# Altium PCB Main_PCB_V1.1.PcbDoc
Units mm, origin at the board's own origin, x right, y up, seen from the top; angles counter-clockwise.
Board outline 100.23 x 100.25 mm, 2 copper layers (Top Layer, Bottom Layer); 142 components, 115 nets, 540 pads, 24 vias.
Unrouted connection lines stored in the file: 336.
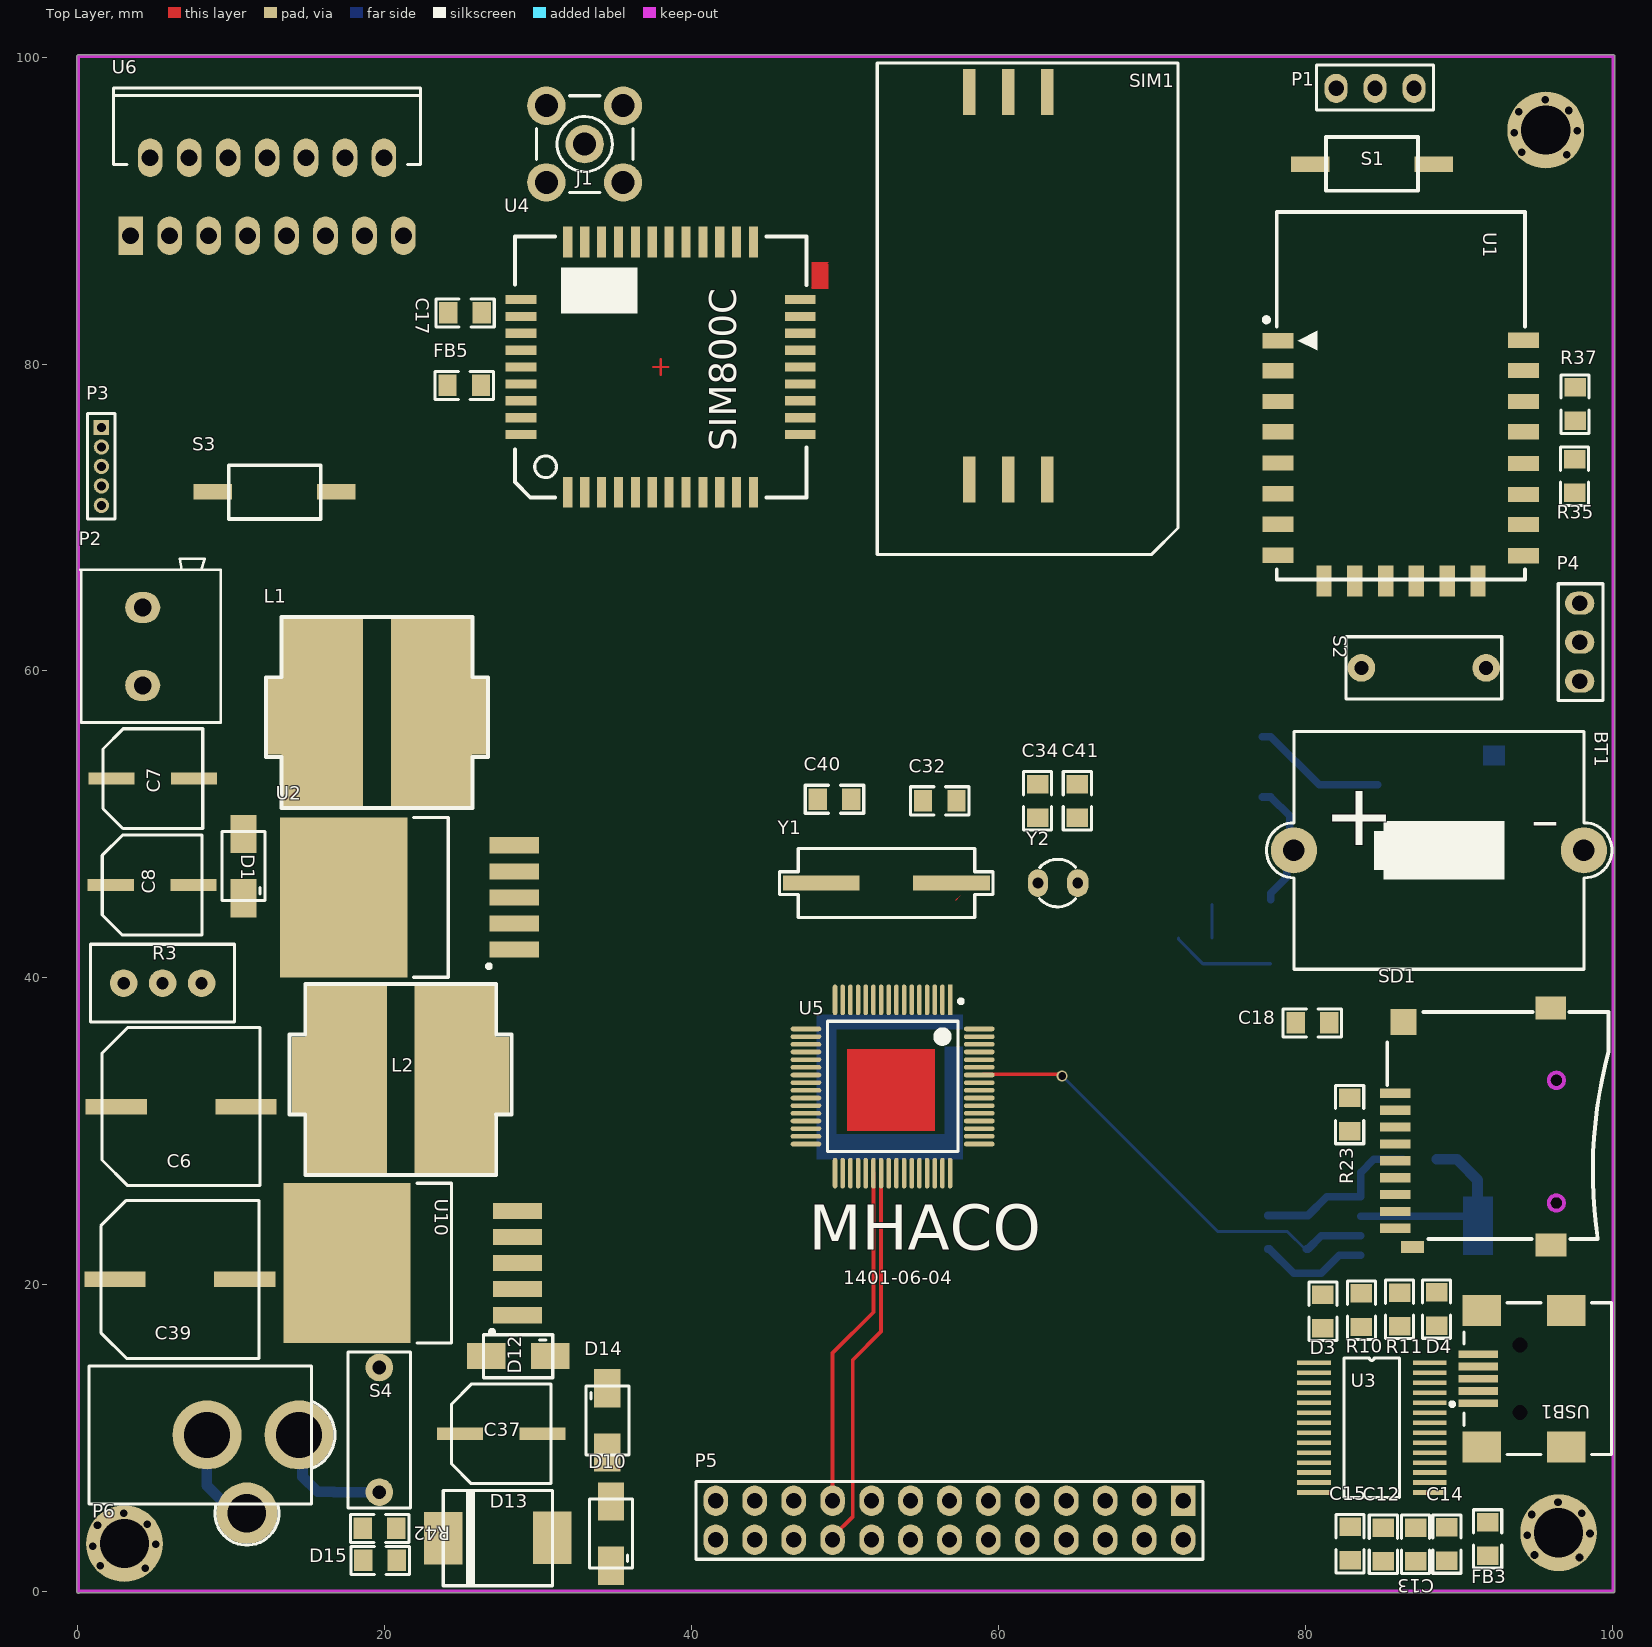
[diagram p0: Top Layer view]
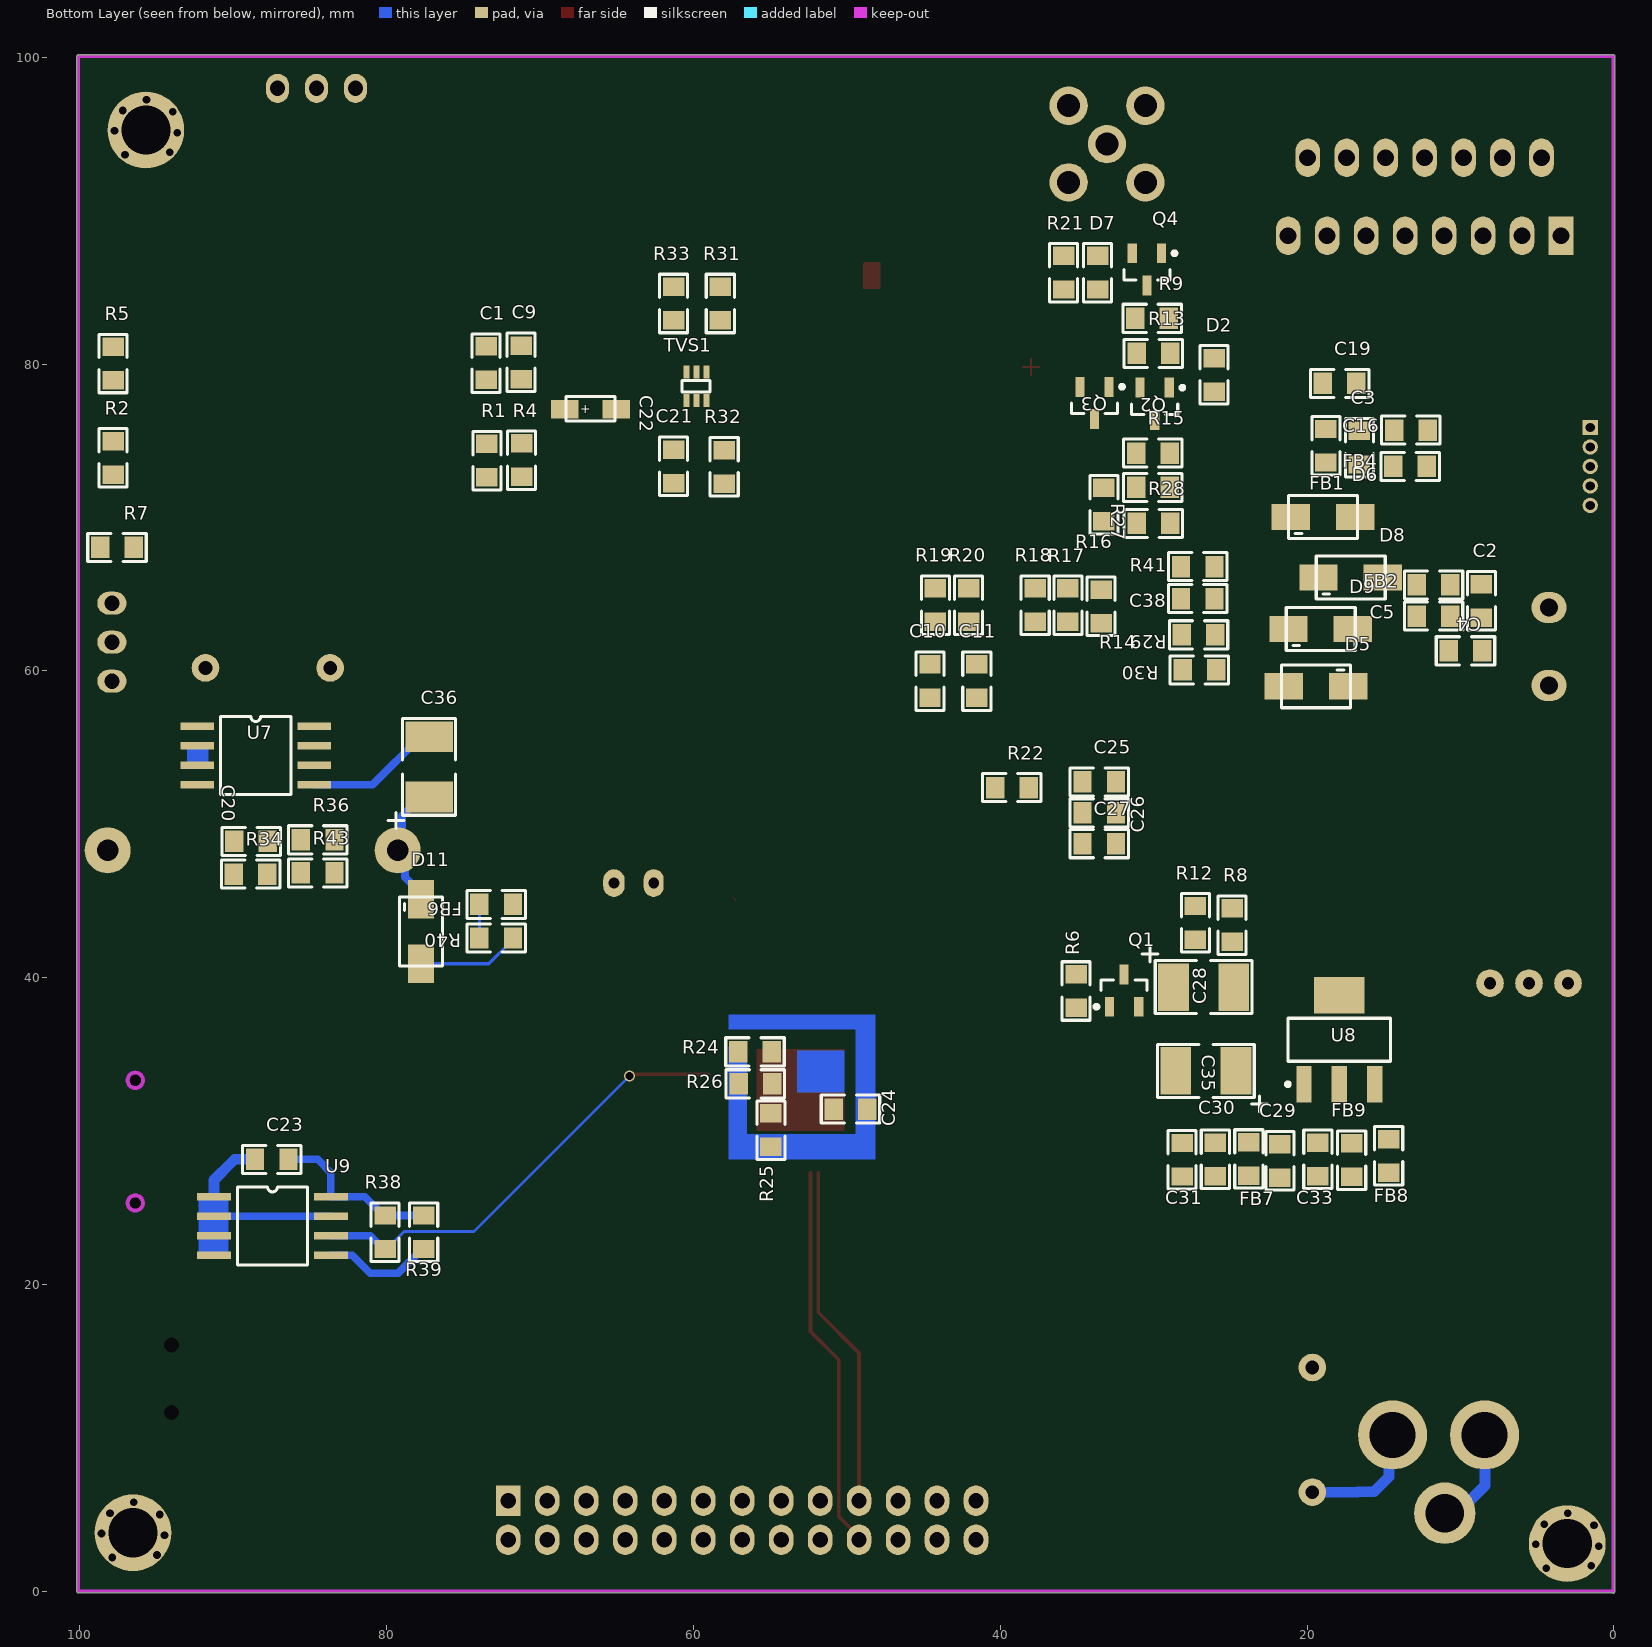
[diagram p1: Bottom Layer view, seen from below]

## Layer stack, top to bottom
Top Solder: solder mask 0.0102, Solder Resist, Dk 3.5
Top Layer: signal copper 0.0356
Dielectric1: dielectric 0.32, FR-4, Dk 4.8
Bottom Layer: signal copper 0.0356
Bottom Solder: solder mask 0.0102, Solder Resist, Dk 3.5

## Board outline
-0.05,0 ccw(c0.051,0) 0.118,-0.075 100.076,-0.075 ccw(c100.076,0.025) 100.177,0.025 ccw(c100.076,0.025) 100.176,0.039 ccw(c100.076,0.051) 100.176,0.051 100.176,100.051 ccw(c100.076,100.051) 100.076,100.151 0.051,100.151 ccw(c0.051,100.051) -0.05,100.051

## Design rules (kind name [scope] priority, off if disabled: settings)
Clearance [All] p1: gap=0.2 ignorepadtopadclearanceinfootprint=FALSE except(0.3: Arc-Fill Arc-Poly Arc-Region Track-Fill Track-Poly Track-Region SMDPad-Fill SMDPad-Poly SMDPad-Region THPad-Fill THPad-Poly THPad-Region Via-Fill Via-Poly Via-Region Fill-Fill Fill-Poly Fill-Region Poly-Poly Poly-Region Region-Region)
Height [All] p1 off: minheight=0 maxheight=25.4 prefheight=12.7
HoleSize [All] p1 off: absolutevalues=TRUE maxlimit=2.54 minlimit=0.025 maxpercent=80.000 minpercent=20.000
HoleToHoleClearance [All] p1 off: gap=0.254 allowstackedmicrovias=TRUE
LayerPairs [All] p1 off: enforce=TRUE
MinimumSolderMaskSliver [All] p1 off: minsoldermaskwidth=0.254
PolygonConnect [All] p1: connectstyle=Relief reliefconductorwidth=0.3 reliefentries=4 polygonreliefangle="90 Angle" airgapwidth=0.3
RoutingVias [All] p1: holewidth=0.5 width=0.7 viastyle="Through Hole" minholewidth=0.5 minwidth=0.7 maxholewidth=2 maxwidth=1.5
SilkToSilkClearance [All] p1 off: silktosilkclearance=0.254
SilkToSolderMaskClearance [IsPad] p1 off: minsilkscreentomaskgap=0.254 clearancetoexposedcopper=TRUE
SolderMaskExpansion [All] p1: expansion=0.102 istentingtop=FALSE
Width [All] p1: maxlimit=0.7 minlimit=0.2 preferedwidth=0.5
23 further rules are at their usual default settings.

## Components (designator, comment, footprint, x,y, rotation, side; value= is the part's Value field where it differs from the comment)
BT1 "Battery" CHARGING_BATT 79.271,49.581 r0 top
C1 "100nF" SMD_805 73.533,80.035 r180 bottom
C2 "10nF" SMD_805 8.661,64.541 r180 bottom
C3 "100nF" SMD_805 16.561,74.574 r0 bottom
C4 "100nF" SMD_805 9.652,61.29 r90 bottom
C5 "100nF" SMD_805 11.786,63.602 r270 bottom
C6 "220uF" c_cyl_smd 6.553,31.674 r180 top
C7 "100uF" c_cyl_smd2 4.978,52.781 r180 top
C8 "100uF" C_CYL_SMD2 4.928,45.847 r180 top
C9 "100nF" SMD_805 71.247,80.086 r180 bottom
C10 "100nF" SMD_805 44.602,59.309 r180 bottom
C11 "100nF" SMD_805 41.554,59.309 r180 bottom
C12 "10nF" SMD_805 85.115,3.099 r180 top
C13 "100nF" SMD_805 87.224,3.099 r180 top
C14 "47nF" SMD_805 89.256,3.124 r180 top
C15 "100nF" SMD_805 82.956,3.15 r180 top
C16 "100nF" SMD_805 13.259,75.717 r270 bottom
C17 "100nF" SMD_805 25.222,83.363 r270 top
C18 "100nF" SMD_805 80.442,37.084 r270 top
C19 "1uF" SMD_805 17.856,78.715 r90 bottom value=100nF
C20 "100nF" SMD_805 88.849,48.92 r270 bottom
C21 "22pF" SMD_805 61.265,73.355 r0 bottom
C22 "1uF" CAP_SMD_A 66.7,77.089 r180 bottom value=1nF
C23 "100nF" SMD_805 87.503,28.194 r270 bottom
C24 "100nF" SMD_805 49.733,31.42 r90 bottom
C25 "100nF" SMD_805 33.519,52.745 r90 bottom
C26 "100nF" SMD_805 33.519,50.731 r90 bottom
C27 "100nF" SMD_805 33.519,48.716 r90 bottom
C28 "100uF" C_B 26.67,39.395 r270 bottom
C29 "100nF" SMD_805 21.742,28.092 r0 bottom
C30 "100nF" SMD_805 23.774,28.219 r0 bottom
C31 "100nF" SMD_805 28.169,28.118 r180 bottom
C32 "18pF" SMD_805 56.159,51.562 r270 top
C33 "100nF" SMD_805 19.329,28.143 r180 bottom
C34 "18pF" SMD_805 62.586,51.562 r180 top
C35 "10uF" C_B 26.67,33.934 r90 bottom
C36 "10uF" C_B 77.216,53.823 r180 bottom
C37 "100uF" C_CYL_SMD2 27.686,10.084 r180 top
C38 "100nF" SMD_805 27.102,64.694 r90 bottom
C39 "1000uF" c_CYL_smd 6.477,20.422 r180 top
C40 "18pF" SMD_805 49.352,51.613 r90 top
C41 "18pF" SMD_805 65.176,51.562 r180 top
D1 "SM5822" TVS 10.795,47.219 r180 top
D2 "LED0" SMD_805 26.086,79.273 r180 bottom
D3 "LED0" SMD_805 81.178,18.288 r180 top
D4 "LED0" SMD_805 88.595,18.44 r180 top
D5 "SM4007" TVS 19.355,58.979 r270 bottom
D6 "SM4007" TVS 19.025,70.053 r90 bottom
D7 "LED0" SMD_805 33.68,85.928 r180 bottom
D8 "SM4007" TVS 17.221,66.116 r90 bottom
D9 "SM4007" TVS 19.177,62.763 r90 bottom
D10 "SMBJ 5V" tvs 34.747,3.708 r180 top
D11 "1N4148" TVS 77.724,43.078 r180 bottom
D12 "SM4007" TVS 28.778,15.316 r270 top
D13 "SM5822" DO_214_AB_SMC 27.356,3.48 r180 top
D14 "SMBJ 5V" TVS 34.544,11.227 r0 top
D15 "LED0" SMD_805 19.736,2.007 r90 top
FB1 "FERRIT" SMD_805 18.745,74.701 r0 bottom
FB2 "FERRIT" SMD_805 11.735,65.583 r90 bottom
FB3 "FERRIT" SMD_805 91.872,3.404 r0 top
FB4 "FERRIT" SMD_805 13.259,73.304 r90 bottom
FB5 "FERRIT" SMD_805 25.222,78.588 r90 top
FB6 "FERRIT" SMD_805 72.873,44.806 r270 bottom
FB7 "FERRIT" SMD_805 25.959,28.194 r0 bottom
FB8 "FERRIT" SMD_805 14.707,28.372 r180 bottom
FB9 "FERRIT" SMD_805 17.12,28.092 r180 bottom
J1 "COAX-F" SMA 33.045,94.336 r0 top
L1 "33uH" INDUC_SMD 19.507,57.556 r0 top
L2 "100uH" INDUC_SMD 21.057,33.122 r180 top
P1 "Header 3" HEADER-3P 84.43,97.968 r0 top
P2 "Header 2" Terminal_2 4.221,61.627 r180 top
P3 "Header 5" MHDR1X5 1.549,75.87 r270 top
P4 "Header 3" HEADER-3P 97.892,62.001 r270 top
P5 "Header 13X2" header_2x13 57.937,4.75 r270 top
P6 "Header 2" adap_jack 0.733,5.711 r0 top
Q1 "BC817" SOT23 31.928,39.04 r180 bottom
Q2 "BC817" SOT23 29.931,77.538 r0 bottom
Q3 "BC817" SOT23 33.858,77.597 r0 bottom
Q4 "BC817" SOT23 30.439,86.301 r0 bottom
R1 "6.8K" SMD_805 73.431,73.736 r0 bottom
R2 "1K" SMD_805 97.79,73.914 r0 bottom
R3 "RPot" POT 0.838,42.189 r270 top value=5K
R4 "1K" SMD_805 71.222,73.711 r180 bottom
R5 "1K" SMD_805 97.841,80.01 r180 bottom
R6 "10K" SMD_805 35.077,39.116 r180 bottom
R7 "1K" SMD_805 97.587,68.072 r270 bottom
R8 "680" SMD_805 24.867,43.459 r0 bottom
R9 "680" SMD_805 30.124,83.007 r270 bottom
R10 "270" SMD_805 83.642,18.313 r0 top
R11 "270" SMD_805 86.131,18.364 r0 top
R12 "6.8K" SMD_805 27.254,43.612 r0 bottom
R13 "1K" SMD_805 29.997,80.67 r90 bottom
R14 "1K" SMD_805 33.401,64.237 r0 bottom
R15 "10K" SMD_805 30.074,74.219 r270 bottom
R16 "10K" SMD_805 33.274,70.815 r180 bottom
R17 "1K" SMD_805 35.611,64.262 r180 bottom
R18 "1K" SMD_805 37.744,64.262 r180 bottom
R19 "5.6K" SMD_805 44.247,64.262 r180 bottom
R20 "1K" SMD_805 42.088,64.262 r180 bottom
R21 "680" SMD_805 35.89,85.928 r180 bottom
R22 "10K" SMD_805 39.268,52.426 r270 bottom
R23 "10K" SMD_805 82.931,31.115 r180 top value=1K
R24 "10K" SMD_805 55.956,35.154 r90 bottom value=1K
R25 "10K" SMD_805 54.915,30.099 r0 bottom value=1K
R26 "10K" SMD_805 55.931,33.071 r90 bottom value=1K
R27 "1K" SMD_805 30.074,71.984 r270 bottom
R28 "10K" SMD_805 29.997,69.596 r90 bottom
R29 "10K" SMD_805 27.102,62.382 r270 bottom
R30 "10K" SMD_805 27.051,60.096 r270 bottom
R31 "47" SMD_805 58.268,83.922 r180 bottom
R32 "47" SMD_805 58.014,73.279 r180 bottom
R33 "47" SMD_805 61.316,83.922 r180 bottom
R34 "1K" SMD_805 88.875,46.787 r270 bottom
R35 "120" SMD_805 97.536,72.669 r0 top
R36 "10K" SMD_805 84.455,48.971 r90 bottom
R37 "1K" SMD_805 97.561,77.368 r0 top
R38 "4.7K" SMD_805 80.061,23.444 r0 bottom
R39 "4.7K" SMD_805 77.546,23.444 r0 bottom
R40 "220" SMD_805 72.822,42.57 r90 bottom
R41 "10K" SMD_805 27.153,66.827 r270 bottom
R42 "1K" SMD_805 19.71,4.089 r90 top
R43 "10K" SMD_805 84.455,46.812 r90 bottom
S1 "SW-PB" smd_button 84.379,93.193 r0 top
S2 "SW-SPST" KEY1 87.859,60.198 r0 top
S3 "SW-PB" smd_button 12.827,71.501 r180 top
S4 "SW-SPST" KEY1 19.66,10.668 r90 top
SD1 "SD_CARD" SD_CARD_HOLDER 92.463,29.568 r270 top
SIM1 "SIM_CARD_SOCKET" SIM_CARD_HOLDER 70.51,68.78 r270 top
TVS1 "SMF05C" SMF05C_6L 59.817,78.537 r90 bottom
U1 "ESP8266-12F" ESP8266_12E 78.183,89.861 r0 top
U2 "LM2596T-ADJ" LM2576_SMD 17.755,45.237 r90 top
U3 "FT232RL" SOP28 84.379,10.719 r0 top
U4 "SIM800C" SIM800C_3D 37.998,79.807 r90 top
U5 "STM32F103RET6" LQFP64 53.111,32.918 r270 top
U6 "L298N" L298 12.294,93.396 r0 top
U7 "MAX485" SOP8 88.519,54.61 r180 bottom
U8 "AMS1117-3.3" SOT223 17.932,35.916 r180 bottom
U9 "24C512" SOP8 87.427,23.952 r180 bottom
U10 "LM2576HVT-5.0" LM2576_SMD 17.958,21.412 r90 top
USB1 "MICRO_USB" MINI_USB 94.031,13.741 r270 top
Y1 "14.7456MHz" xtal_smd 52.68,46.228 r0 top
Y2 "32.768KHz" xtal_rtc 63.957,46.126 r270 top

## Footprints (in the part's own frame and the unit in brackets; to place one, negate y for a bottom-side part, rotate by r counter-clockwise, add the part's x,y. Pads: shape width x height; smd on the part's side, far side on the other; paste and mask are expansions set on the pad)
adap_jack [mm]
  round 4.5 hole 3: 1(7.7,4.5) 2(13.7,4.5)
  round 4 hole 2.5: 1(10.3,-0.6)
  silkscreen extent 0,-2.68 16.04,9, body extent -0.1,-0.5 14.7,9, height 10
C_B [mm]
  rect 3.1x2 smd: 1(-0.002,-2.041) 2(-0.002,1.896)
  silkscreen extent -2.67,-4.07 1.73,3.07, body extent -1.4,-1.78 1.4,1.78, height 2.23
c_cyl_smd [mm]
  rect 4x1 smd: 1(4.039,0.076) 2(-4.42,0.076)
  silkscreen extent -5.33,-5.08 4.97,5.22, body extent -5.33,-5.08 4.97,5.22, height 10
c_CYL_smd [mm]
  rect 4x1 smd: 1(4.039,0.076) 2(-4.42,0.076)
  silkscreen extent -5.33,-5.08 4.97,5.22, body extent -5.33,-5.08 4.97,5.22, height 10
c_cyl_smd2 [mm]
  rect 3x0.8 smd: 1(2.769,-0.203) 2(-2.616,-0.203)
  silkscreen extent -3.18,-3.45 3.33,3.05, body extent -3.18,-3.45 3.32,3.05, height 5
C_CYL_SMD2 [mm]
  rect 3x0.8 smd: 1(2.769,-0.203) 2(-2.616,-0.203)
  silkscreen extent -3.18,-3.45 3.33,3.05, body extent -3.18,-3.45 3.32,3.05, height 5
CAP_SMD_A [mm]
  rect 1.8x1.2 smd: 1(-1.676,-0.025) 2(1.676,-0.025)
  silkscreen extent -1.6,-0.81 1.6,0.79
CHARGING_BATT [mm]
  round 3 hole 1.4: 1(0,-1.27) 2(18.9,-1.27)
  silkscreen extent -1.79,-9.02 20.72,6.48
DO_214_AB_SMC [mm]
  rect 2.5x3.4 smd: 1(-3.581,-0.025) 2(3.531,0)
  silkscreen extent -3.58,-3.12 3.53,3.1
ESP8266_12E [mm]
  rect 2x1 smd: 1(0.051,-8.331) 2(0.051,-10.301) 3(0.051,-12.301) 4(0.051,-14.271) 5(0.051,-16.311) 6(0.051,-18.321) 7(0.051,-20.311) 8(0.051,-22.321) 15(16.051,-22.361) 16(16.051,-20.321) 17(16.051,-18.361) 18(16.051,-16.341) 19(16.051,-14.281) 20(16.051,-12.301) 21(16.051,-10.281) 22(16.051,-8.301)
  rect 1x2 smd: 9(3.048,-24.003) 10(5.055,-24.003) 11(7.061,-24.003) 12(9.068,-24.003) 13(11.074,-24.003) 14(13.081,-24.003)
  silkscreen extent -0.86,-23.9 16.13,0.04, body extent 0.05,-23.88 16.05,0.5, height 2.6
HEADER-3P [mm]
  oval 1.5x1.9 hole 1: 1(-2.413,0) 2(0.127,0) 3(2.667,0)
  silkscreen extent -3.68,-1.4 3.94,1.52
header_2x13 [mm]
  rect 2x1.6 hole 1: 1(-1.168,14.122)
  oval 2x1.6 hole 1: 2(1.372,14.122) 3(-1.168,11.582) 4(1.372,11.582) 5(-1.168,9.042) 6(1.372,9.042) 7(-1.168,6.502) 8(1.372,6.502) 9(-1.168,3.962) 10(1.372,3.962) 11(-1.168,1.422) 12(1.372,1.422) 13(-1.168,-1.118) 14(1.372,-1.118) 15(-1.168,-3.658) 16(1.372,-3.658) 17(-1.168,-6.198) 18(1.372,-6.198) 19(-1.168,-8.738) 20(1.372,-8.738) 21(-1.168,-11.278) 22(1.372,-11.278) 23(-1.168,-13.818) 24(1.372,-13.818) 25(-1.168,-16.358) 26(1.372,-16.358)
  silkscreen extent -2.44,-17.63 2.64,15.39
INDUC_SMD [mm]
  rect 2x5 smd: 1(-6.096,-0.508) 2(6.096,-0.508)
  rect 5.3x12.4 smd: 1(-3.556,-0.254) 2(3.556,-0.254)
  silkscreen extent -7.23,-6.48 7.24,5.97
KEY1 [mm]
  round 1.8 hole 0.9: 1(-4.191,0) 2(3.937,0)
  silkscreen extent -5.21,-2.03 4.95,2.03, body extent -5.21,-2.03 4.95,2.03, height 7.1
L298 [mm]
  rect 1.6x2.5 hole 1.1: 1(-8.839,-5.029)
  oval 1.6x2.5 hole 1.1: 2(-7.569,0.051) 3(-6.299,-5.029) 4(-5.029,0.051) 5(-3.759,-5.029) 6(-2.489,0.051) 7(-1.219,-5.029) 8(0.051,0.051) 9(1.321,-5.029) 10(2.591,0.051) 11(3.861,-5.029) 12(5.131,0.051) 13(6.401,-5.029) 14(7.671,0.051) 15(8.941,-5.029)
  silkscreen extent -9.95,-0.4 10.05,4.6
LM2576_SMD [mm]
  rect 1.05x3.2 smd: 1(-3.4,-10.699) 2(-1.7,-10.699) 3(0,-10.699) 4(1.7,-10.699) 5(3.4,-10.699)
  rect 10.45x8.3 smd: 3(0,0.402)
  silkscreen extent -5.2,-9.17 5.2,-4.15, body extent -5.2,-6.4 5.2,3, height 4.65
LQFP64 [mm]
  rect 2x0.3 smd: 1(-5.646,3.75)
  oval 2x0.3 smd: 2(-5.646,3.25) 3(-5.646,2.75) 4(-5.646,2.25) 5(-5.646,1.75) 6(-5.646,1.25) 7(-5.646,0.75) 8(-5.646,0.25) 9(-5.646,-0.25) 10(-5.646,-0.75) 11(-5.646,-1.25) 12(-5.646,-1.75) 13(-5.646,-2.25) 14(-5.646,-2.75) 15(-5.646,-3.25) 16(-5.646,-3.75) 33(5.646,-3.75) 34(5.646,-3.25) 35(5.646,-2.75) 36(5.646,-2.25) 37(5.646,-1.75) 38(5.646,-1.25) 39(5.646,-0.75) 40(5.646,-0.25) 41(5.646,0.25) 42(5.646,0.75) 43(5.646,1.25) 44(5.646,1.75) 45(5.646,2.25) 46(5.646,2.75) 47(5.646,3.25) 48(5.646,3.75)
  oval 0.3x2 smd: 17(-3.75,-5.646) 18(-3.25,-5.646) 19(-2.75,-5.646) 20(-2.25,-5.646) 21(-1.75,-5.646) 22(-1.25,-5.646) 23(-0.75,-5.646) 24(-0.25,-5.646) 25(0.25,-5.646) 26(0.75,-5.646) 27(1.25,-5.646) 28(1.75,-5.646) 29(2.25,-5.646) 30(2.75,-5.646) 31(3.25,-5.646) 32(3.75,-5.646) 49(3.75,5.646) 50(3.25,5.646) 51(2.75,5.646) 52(2.25,5.646) 53(1.75,5.646) 54(1.25,5.646) 55(0.75,5.646) 56(0.25,5.646) 57(-0.25,5.646) 58(-0.75,5.646) 59(-1.25,5.646) 60(-1.75,5.646) 61(-2.25,5.646) 62(-2.75,5.646) 63(-3.25,5.646) 64(-3.75,5.646)
  silkscreen extent -5.67,-4.25 4.25,4.58
MHDR1X5 [mm] "Connector; Header; 5 Position"
  rect 1x1 hole 0.6: 1(0,0)
  round 1 hole 0.6: 2(1.27,0) 3(2.54,0) 4(3.81,0) 5(5.08,0)
  silkscreen extent -0.9,-0.9 5.98,0.9
MINI_USB [mm]
  rect 0.5x2.6 smd mask+0.04: 1(1.468,-2.753) 2(0.668,-2.753) 3(-0.132,-2.753) 4(-0.932,-2.753) 5(-1.732,-2.753)
  rect 2x2.5 smd: 6(-4.582,-2.526) 7(-4.582,2.974) 8(4.318,-2.526) 9(4.318,2.974)
  round 0.6 hole 1 unplated: MH1(-2.332,-0.026) MH2(2.068,-0.026)
  silkscreen extent -5.08,-4.57 4.82,5.92, body extent -5.08,-3.38 4.82,5.87, height 3.93
POT [mm]
  round 1.8 hole 0.8: 1(2.54,2.159) 2(2.54,7.239) 3(2.54,4.699)
  silkscreen extent 0,0 5.08,9.4
SD_CARD_HOLDER [mm]
  rect 0.6x2 smd: 1(-2.906,-6.592) 2(-1.806,-6.592) 3(-0.706,-6.592) 4(0.394,-6.592) 5(1.494,-6.592) 6(2.594,-6.592) 7(3.694,-6.592) 8(4.794,-6.592) 9(5.894,-6.592)
  rect 0.8x1.5 smd: 10(7.103,-5.458)
  rect 1.7x1.7 smd: 11(-7.556,-6.051)
  rect 1.5x2 smd: 12(6.976,3.559) 13(-8.456,3.549)
  Keep-Out Layer lines w0.254: 4.744,3.908 ccw(c4.244,3.908) 3.744,3.908 ccw(c4.244,3.908) 4.744,3.908 ; -3.256,3.908 ccw(c-3.756,3.908) -4.256,3.908 ccw(c-3.756,3.908) -3.256,3.908
  silkscreen extent -8.21,-7.11 6.59,7.31
SIM800C_3D [mm]
  rect 2x0.6 smd: 1(-8.152,6.05) 2(-8.152,4.95) 3(-8.152,3.85) 4(-8.152,2.75) 5(-8.152,1.65) 6(-8.152,0.55) 7(-8.152,-0.55) 8(-8.152,-1.65) 9(-8.152,-2.75) 10(-8.152,-3.85) 11(-8.152,-4.95) 12(-8.152,-6.05) 22(8.152,-6.05) 23(8.152,-4.95) 24(8.152,-3.85) 25(8.152,-2.75) 26(8.152,-1.65) 27(8.152,-0.55) 28(8.152,0.55) 29(8.152,1.65) 30(8.152,2.75) 31(8.152,3.85) 32(8.152,4.95) 33(8.152,6.05)
  rect 0.6x2 smd: 13(-4.4,-9.102) 14(-3.3,-9.102) 15(-2.2,-9.102) 16(-1.1,-9.102) 17(0,-9.102) 18(1.1,-9.102) 19(2.2,-9.102) 20(3.3,-9.102) 21(4.4,-9.102) 34(4.4,9.102) 35(3.3,9.102) 36(2.2,9.102) 37(1.1,9.102) 38(0,9.102) 39(-1.1,9.102) 40(-2.2,9.102) 41(-3.3,9.102) 42(-4.4,9.102)
  Top Layer lines w0.152: 0,0.5 0,-0.5 ; -0.5,0 0.5,0
  silkscreen extent -8.5,-9.5 8.5,9.5, body extent -7.85,-8.8 7.85,8.8, height 1.9
SIM_CARD_HOLDER [mm]
  rect 3x0.8 smd: 1(-28.959,-12.395) 2(-28.959,-9.855) 3(-28.959,-7.315) 4(-3.708,-12.395) 5(-3.708,-9.855) 6(-3.708,-7.315)
  silkscreen extent -30.84,-18.4 1.2,1.2, body extent -29.64,-17.2 0,0, height 2.6
SMA [mm]
  round 2.5 hole 1.5: 1(0,0) 2(-2.5,2.5) 3(2.5,2.5) 4(-2.5,-2.5) 5(2.5,-2.5)
  silkscreen extent -3.15,-3.15 3.15,3.15
SMD_805 [mm]
  rect 1.4x1.2 smd: 1(0.025,1.118) 2(0.025,-1.067)
  silkscreen extent -0.89,-1.88 0.94,1.93, body extent -0.66,-1.07 0.71,1.14, height 1.1
smd_button [mm]
  rect 2.5x1 smd: 1(4.013,-0.178) 2(-4.039,-0.178)
  silkscreen extent -3.02,-1.9 2.98,1.6
SMF05C_6L [mm]
  rect 0.85x0.4 smd: 1(-0.914,0.635) 2(-0.914,-0.015) 3(-0.914,-0.665) 4(0.936,-0.665) 5(0.936,-0.015) 6(0.936,0.635)
  silkscreen extent -0.36,-0.91 0.38,0.91
SOP8 [mm]
  rect 2.2x0.5 smd: 1(-3.81,1.778) 2(-3.81,0.508) 3(-3.81,-0.762) 4(-3.81,-2.032) 5(3.806,-2.032) 6(3.806,-0.762) 7(3.806,0.508) 8(3.806,1.778)
  silkscreen extent -2.29,-2.67 2.29,2.41
SOP28 [mm]
  rect 2.2x0.3 smd: 1(-3.81,4.191) 2(-3.81,3.541) 3(-3.81,2.891) 4(-3.81,2.241) 5(-3.81,1.591) 6(-3.81,0.941) 7(-3.81,0.291) 8(-3.81,-0.359) 9(-3.81,-1.009) 10(-3.81,-1.659) 11(-3.81,-2.309) 12(-3.81,-2.959) 13(-3.81,-3.609) 14(-3.81,-4.259) 15(3.736,-4.259) 16(3.736,-3.609) 17(3.736,-2.959) 18(3.736,-2.309) 19(3.736,-1.659) 20(3.736,-1.009) 21(3.736,-0.359) 22(3.736,0.291) 23(3.736,0.941) 24(3.736,1.591) 25(3.736,2.241) 26(3.736,2.891) 27(3.736,3.541) 28(3.736,4.191)
  silkscreen extent -1.85,-4.58 1.78,4.52
SOT23 [mm]
  rect 0.6x1.3 smd: 1(-0.95,-0.923) 2(0.95,-0.923) 3(0,1.177)
  silkscreen extent -1.93,-1.05 1.5,0.83, body extent -1.5,-0.57 1.5,0.83, height 1.1
SOT223 [mm]
  rect 1x2.4 smd: 1(-2.269,-2.85) 2(0.031,-2.85) 3(2.331,-2.85)
  rect 3.3x2.4 smd: 2(0.031,2.95)
  silkscreen extent -3.44,-2.97 3.38,1.45, body extent -3.21,-3.44 3.27,3.54, height 1.64
Terminal_2 [mil]
  oval 90x80 hole 46: 1(-0.83,-98.74) 2(-0.83,101.26)
  silkscreen extent -201,-224 159,196, body extent -201,-226 156,197, height 493
TVS [mm]
  rect 1.7x2.5 smd: 1(-0.025,-2.159) 2(-0.025,2.032)
  silkscreen extent -1.42,-2.32 1.38,2.18, body extent -1.5,-2.76 1.42,2.74, height 2.23
tvs [mm]
  rect 1.7x2.5 smd: 1(-0.025,-2.159) 2(-0.025,2.032)
  silkscreen extent -1.42,-2.32 1.38,2.18, body extent -1.5,-2.76 1.42,2.74, height 2.23
xtal_rtc [mm]
  oval 1.8x1.4 hole 0.7: 1(-0.051,1.22)
  oval 1.8x1.3 hole 0.7: 2(-0.051,-1.372)
  silkscreen extent -1.6,-1.27 1.5,1.09
xtal_smd [mm]
  rect 5x1 smd: 1(-4.216,-0.051) 2(4.267,-0.051)
  silkscreen extent -6.93,-2.29 6.98,2.21

## Part data
BT1: "Multicell Battery", LatestRevisionDate=17-Jul-2002, LatestRevisionNote="Re-released for DXP Platform.", PackageReference=BAT-2, Published=24-Mar-1999, Publisher="Altium Limited"
C1 C2 C3 C4 C5 C9 C10 C11 C12 C13 C14 C15 C16 C17 C18 C19 C20 C21 C23 C24 C25 C26 C27 C29 C30 C31 C32 C33 C34 C38 C40 C41: library part Cap, "Capacitor", LatestRevisionDate=17-Jul-2002, LatestRevisionNote="Re-released for DXP Platform.", PackageReference=RAD-0.3, Published=8-Jun-2000, Publisher="Altium Limited"
C6 C7 C8 C22 C28 C35 C36 C37 C39: library part "Cap Pol1", "Polarized Capacitor (Radial)", LatestRevisionDate=17-Jul-2002, LatestRevisionNote="Re-released for DXP Platform.", PackageReference=RB7.6-15, Published=8-Jun-2000, Publisher="Altium Limited"
D1 D10 D13 D14: library part "Diode 11DQ03", "Schottky Rectifier", Code_JEDEC=DO-204-AL, ComponentLink1Description="Manufacturer Link", ComponentLink1URL=http://www.irf.com/, ComponentLink2Description=Datasheet, ComponentLink2URL=http://www.irf.com/product-info/datasheets/data/11dq03.pdf, DatasheetVersion=Dec-1997, LatestRevisionDate=17-Jul-2002, LatestRevisionNote="Re-released for DXP Platform.", PackageReference=DO-204AL, Published=8-Jun-2000, Publisher="Altium Limited"
D2 D3 D4 D7 D15: "Typical INFRARED GaAs LED", LatestRevisionDate=08-Jul-2005, LatestRevisionNote="Mech Layer 1 removed.", PackageReference=LED-0, Published=8-Jun-2000, Publisher="Altium Limited"
D5 D6 D8 D9 D11 D12: library part "Diode 1N4007", "1 Amp General Purpose Rectifier", Code_JEDEC=DO-204-AL, ComponentLink1Description="Manufacturer Link", ComponentLink1URL=http://www.fairchildsemi.com/, ComponentLink2Description=Datasheet, ComponentLink2URL=http://www.fairchildsemi.com/ds/1N%2F1N4001.pdf, DatasheetVersion=1998, LatestRevisionDate=17-Jul-2002, LatestRevisionNote="Re-released for DXP Platform.", PackageReference=DO-41, PackageVersion=Aug-1999, Published=8-Jun-2000, Publisher="Altium Limited"
FB1 FB2 FB3 FB4 FB5 FB6 FB7 FB8 FB9: library part "Fuse 1", "Fuse", LatestRevisionDate=17-Jul-2002, LatestRevisionNote="Re-released for DXP Platform.", PackageReference=PIN-W2/E2.8, Published=8-Jun-2000, Publisher="Altium Limited"
J1: "RF Coaxial PCB Connector, MCX; Thru-Hole, Right-Angle Mount Socket, Blunt Post Terminal, 50 Ohm Impedance", PackageDocument=04-Jul-1999, ComponentLink1Description="Manufacturer Link", ComponentLink1URL=http://www.amphenolrf.com/, DatasheetDocument=30-May-2003, DrillSize="Corresponds to nominal value.", LatestRevisionDate=15-Jul-2004, LatestRevisionNote="Component Replaced.", PackageReference=919-119J-51AX, PCB_Layout="Complies with manufacturer's recommendation.", Published=15-Jul-2004, Publisher="Altium Limited"
L1: library part Inductor, "Inductor", Current=3A, Code_IEC=1005, Code_JEITA=0402, LatestRevisionDate=29-May-2009, LatestRevisionNote="IPC-7351 Footprint Added.", PackageDescription="Chip Inductor", PackageReference=0402-A, Published=8-Jun-2000, Publisher="Altium Limited"
L2: library part Inductor, "Inductor", Code_IEC=1005, Code_JEITA=0402, LatestRevisionDate=29-May-2009, LatestRevisionNote="IPC-7351 Footprint Added.", PackageDescription="Chip Inductor", PackageReference=0402-A, Published=8-Jun-2000, Publisher="Altium Limited"
P1 P4: "Header, 3-Pin", LatestRevisionDate=17-Jul-2002, LatestRevisionNote="Re-released for DXP Platform.", Publisher="Altium Limited"
P2 P6: "Header, 2-Pin", LatestRevisionDate=17-Jul-2002, LatestRevisionNote="Re-released for DXP Platform.", Publisher="Altium Limited"
P3: "Header, 5-Pin", LatestRevisionDate=17-Jul-2002, LatestRevisionNote="Re-released for DXP Platform.", Publisher="Altium Limited"
P5: "Header, 13-Pin, Dual row", LatestRevisionDate=17-Jul-2002, LatestRevisionNote="Re-released for DXP Platform.", Publisher="Altium Limited"
Q1: library part NPN, "NPN Bipolar Transistor", Code_JEDEC=TO-226-AA, LatestRevisionDate=17-Jul-2002, LatestRevisionNote="Re-released for DXP Platform.", PackageReference=TO-226, Published=8-Jun-2000, Publisher="Altium Limited"
Q2 Q3 Q4: library part 2N3904, "NPN General Purpose Amplifier", Code_JEDEC=TO-92A, ComponentLink1Description="Manufacturer Link", ComponentLink1URL=http://www.fairchildsemi.com/, ComponentLink2Description=Datasheet, ComponentLink2URL=http://www.fairchildsemi.com/ds/2N%2F2N3904.pdf, DatasheetVersion=1997, LatestRevisionDate=15-Jan-2003, LatestRevisionNote="PCB Footprint 'BCY-W3/D4.7' replaced", PackageReference=TO-92A, PackageVersion=Sep-1998, Published=8-Jun-2000, Publisher="Altium Limited"
R1 R2 R4 R5 R6 R7 R8 R9 R10 R11 R12 R13 R14 R15 R16 R17 R18 R19 R20 R21 R22 R23 R24 R25 R26 R27 R28 R29 R30 R31 R32 R33 R34 R35 R36 R37 R38 R39 R40 R41 R42 R43: library part Res1, "Resistor", LatestRevisionDate=17-Jul-2002, LatestRevisionNote="Re-released for DXP Platform.", PackageReference=AXIAL-0.3, Published=8-Jun-2000, Publisher="Altium Limited"
R3: "Potentiometer", LatestRevisionDate=17-Jul-2002, LatestRevisionNote="Re-released for DXP Platform.", PackageReference=VR5, Published=8-Jun-2000, Publisher="Altium Limited", Set Position=0.5, Sim Note="Enter the Resistance value and the set point into parameter fields."
S1 S3: "Switch", LatestRevisionDate=17-Jul-2002, LatestRevisionNote="Re-released for DXP Platform.", PackageReference=SPST-2, Published=24-Mar-1999, Publisher="Altium Limited"
S2 S4: "Single-Pole, Single-Throw Switch", LatestRevisionDate=17-Jul-2002, LatestRevisionNote="Re-released for DXP Platform.", PackageReference=SPST-2, Published=24-Mar-1999, Publisher="Altium Limited"
SD1: library part MICRO_SD_CARD_HOLDER
TVS1: library part TVS_ARRAY
U1: library part ESP8266
U2: "SIMPLE SWITCHER Power Converter 150 KHz 3A Step-Down Voltage Regulator", DigiKeyPartNumber=LM2596T-ADJ-ND, Manufacturer="National Semiconductor", PackageTopMarking="NSUZXYTT*LM2596T*-ADJ P+", PowerWise=N, ComponentLink1Description="LM2596 Datasheet", ComponentLink1URL=http://www.national.com/ds/LM/LM2596.pdf, ComponentLink2Description="LM2596 Web Page", ComponentLink2URL=http://www.national.com/pf/LM/LM2596.html, ComponentLink3Description="T05D Package Page", ComponentLink3URL=http://www.national.com/packaging/folders/t05d.html, CompType=Switcher, DatasheetVersion=May-2002, PackageDescription="TO-220, Molded, Stagger Bend, 5 Lead", PackageReference=T05D, PackageVersion="revA, Oct-1989", PartNumber=LM2596T-ADJ, PinCount=5, Published=4-Dec-2008, Publisher="Altium Limited", RoHS=O
U5: library part STM32F103R8T6, "STM32 ARM-based 32-bit MCU with 64 Kbytes Flash, 64-pin LQFP, Industrial Temperature", ComponentLink1Description="Manufacturer Link", ComponentLink1URL=www.st.com/stm32, ComponentLink2Description=Datasheet, ComponentLink2URL=http://www.st.com/stonline/products/literature/ds/13587.pdf, DatasheetVersion="rev6, Mar-2008", PackageDescription="64-Pin Low-Profile Quad Flat Pack, 10 x 10 mm Body, 0.5 mm Pitch (LQFP64)", PackageReference=LQFP64, PackageVersion=Mar-2008, Published=30-May-2008, Publisher="Altium Limited"
U6: "Dual Full Bridge Driver", ComponentLink1Description="Manufacturer Link", ComponentLink1URL=http://www.st.com/, ComponentLink2Description=Datasheet, ComponentLink2URL=http://www.st.com/stonline/products/literature/ds/1773/l298.pdf, DatasheetVersion=Jul-1999, LatestRevisionDate=14-May-2007, LatestRevisionNote="Mapped to vertical PCB.", PackageDescription="TO, Thru-Hole, Vertical, Heatsink Mounted; 15 Bent Staggered Leads; Pitch 1.27 mm", PackageReference=Multiwatt15V, Published=8-Jun-2000, Publisher="Altium Limited"
U8: library part LD1117DT33
U9: library part 24Cxx
U10: "SIMPLE SWITCHER; 3A Step-Down Voltage Regulator", DigiKeyPartNumber=LM2576HVT-5.0-ND, Manufacturer="National Semiconductor", PackageTopMarking="NSUZXYTT*LM2576HVT*-5.0 P+", PowerWise=N, Code_JEDEC=TO-220-AB, ComponentLink1Description="LM2576HV Datasheet", ComponentLink1URL=http://www.national.com/ds/LM/LM2576HV.pdf, ComponentLink2Description="LM2576HV Web Page", ComponentLink2URL=http://www.national.com/pf/LM/LM2576HV.html, ComponentLink3Description="T05A Package Page", ComponentLink3URL=http://www.national.com/packaging/folders/t05a.html, CompType=Switcher, DatasheetVersion=Aug-2004, PackageDescription="TO-220, Molded, 5 Lead, Straight", PackageReference=T05A, PackageVersion="revJ, Jan-1992", PartNumber=LM2576HVT-5.0, PinCount=5, Published=4-Dec-2008, Publisher="Altium Limited", RoHS=O
Y1 Y2: library part XTAL, "Crystal Oscillator", LatestRevisionDate=17-Jul-2002, LatestRevisionNote="Re-released for DXP Platform.", PackageReference=R38, Published=8-Jun-2000, Publisher="Altium Limited"

## Free pads (board coordinates)
  round 5 hole 3.2: 9(3.048,3.124) 9(95.682,95.25) 9(96.52,3.835)

## Via types
v1: diameter 0.5, hole 0.5, Top Layer to Bottom Layer, 21 vias
v2: diameter 1.2, hole 1.2, Top Layer to Bottom Layer, 2 vias
v3: diameter 0.7, hole 0.5, Top Layer to Bottom Layer, 1 vias

## Nets (pads, with @x,y where several pads share a name; then routed paths per layer and width w, separated by ;. In a path a pad name is that pad's centre, name@x,y a point inside that pad or via, vN(x,y) a via of type N, cw(c..) or ccw(c..) an arc to the next point about the centre after c; other vN are vias at no path point)
3V3: C9.2 C18.2 C23.1 C24.2 C25.2 C26.2 C27.2 C31.2 D10.2 FB7.1 FB8.2 P1.1 P3.1 P5.25 R1.2 R2.1 R4.1 R23.1 R24.1 R25.1 R26.1 R29.2 R30.2 R38.2 R39.2 R41.2 R42.2 S2.1 SD1.4 U1.8 U5.19 U5.32 U5.48 U5.64 U9.8 | length 11.3
  Bottom Layer w0.5: R39.2 R38.2 80.186,24.511 81.405,25.73 U9.8 83.621,27.309 84.48,28.169 C23.1
3V3A: C33.2 C35.1 FB8.1 U5.13
4V0: C3.2 C7.1 C10.2 C11.2 FB1.2 R9.2 R20.1 R21.2 U4.34 U4.35
5V0: C20.1 C29.2 C39.1 D14.2 FB5.2 FB6.1 L2.2 P5.24 R6.2 R37.1 U7.8 U8.3 U10.4
5V0_L298: C17.2 FB5.1 U6.9
12V0_L298: C16.2 D5.2 D6.2 FB4.1 U6.4
BOOT0: R43.2 S2.2 U5.60
DIR_1: U5.22 U6.5 U6.12
DIR_2: U5.23 U6.7 U6.10
GND: BT1.2 C1.1 C3.1 C4.1 C5.1 C6.2 C7.2 C8.2 C9.1 C10.1 C11.1 C12.1 C13.1 C14.1 C15.1 C16.1 C17.1 C18.1 C20.2 C21.1 C22.2 C23.2 C24.1 C25.1 C26.1 C27.1 C28.2 C29.1 C30.1 C31.1 C32.2 C34.2 C36.2 C37.2 C38.1 C39.2 C40.2 C41.2 D1.1 D8.1 D9.1 D10.1 D13.1 D14.1 D15.2 FB9.2 J1.2 J1.3 J1.4 J1.5 P1.3 P3.5 P4.3 P5.26 P6.1 Q1.2 Q2.2 Q3.2 Q4.2 R3.2 R7.1 R12.1 R15.2 R16.2 R19.1 R22.1 R28.2 R34.2 R36.1 R43.1 S1.1 S3.1 SD1.6 SD1.10 SD1.11 SD1.12 SD1.13 SIM1.4 TVS1.2 U1.15 U2.3 U3.7 U3.18 U3.21 U3.25 U3.26 U4.8 U4.13 U4.19 U4.21 U4.27 U4.30 U4.31 U4.33 U4.36 U4.37 U5.18 U5.31 U5.47 U5.63 U6.1 U6.8 U6.15 U7.5 U8.1 U9.1 U9.2 U9.3 U9.4 U9.7 U10.3 U10.5 USB1.5 | length 27.4
  Bottom Layer w0.5: C36.2 77.768,55.719 80.909,52.578 U7.5 ; U9.7 U9.2
  Bottom Layer w0.7: P6.1@8.433,10.211 8.407,10.185 8.407,6.909 10.205,5.111 P6.1@11.033,5.111 ; C23.2 89.891,28.169 90.118,27.941 91.237,26.822 U9.1
GNDA: C33.1 C35.2 FB9.1 U5.12
MCU_OUT1: P5.1 U5.14
MCU_OUT2: P5.2 U5.20
MCU_OUT3: P5.3 U5.21
MCU_OUT4: P5.4 U5.44
MCU_OUT5: P5.5 U5.45
MCU_OUT6: P5.6 U5.62
MCU_OUT7: P5.7 U5.2
MCU_OUT8: P5.8 U5.33
MCU_OUT9: P5.9 U5.34
MCU_OUT10: P5.10 U5.35
MCU_OUT11: P5.11 U5.36
MCU_OUT12: P5.12 U5.8
MCU_OUT13: P5.13 U5.9
MCU_OUT14: P5.14 U5.10
MCU_OUT15: P5.15 U5.11
MCU_OUT16: P5.16 U5.24
MCU_OUT17: P5.17 U5.25
MCU_OUT18: P5.18 U5.37
MCU_OUT19: P5.19 U5.38 | length 22.5
  Top Layer w0.25: P5.19 49.2,15.545 51.861,18.206 U5.38
MCU_OUT20: P5.20 U5.39 | length 25.2
  Top Layer w0.25: P5.20 49.2,3.578 50.521,4.899 50.521,15.113 52.361,16.954 U5.39
MCU_OUT21: P5.21 U5.40
MCU_OUT22: P5.22 U5.51
MCU_OUT23: P5.23 U5.52
MCU_RX1: U3.1 U5.43
MCU_RX2: U1.22 U5.17
MCU_RX3: R17.2 U5.30
MCU_RX5: U5.54 U7.1
MCU_TX1: U3.5 U5.42
MCU_TX2: U1.21 U5.16
MCU_TX3: R18.2 U5.29
MCU_TX5: U5.53 U7.4
MISO1: R26.2 SD1.7 U5.56
MOSI1: R24.2 SD1.3 U5.57
MOTOR1: C19.1 D5.1 D9.2 P2.2 U6.2 U6.14
MOTOR2: C19.2 D6.1 D8.2 P2.1 U6.3 U6.13
NET_LIGHT: R13.1 U4.41
NetC1_2: C1.2 R1.1 S1.2 U1.1
NetC2_1: C2.1 R3.3 U2.4
NetC2_2: C2.2 C4.2 C6.1 FB1.1 L1.2 R3.1
NetC5_2: C5.2 C8.1 FB2.1 U2.1
NetC12_2: C12.2 C13.2 C14.2 FB3.1 U3.20
NetC28_1: C28.1 C30.2 FB7.2 U8.2
NetD1_2: D1.2 L1.1 U2.2
NetD2_1: D2.1 R9.1
NetD2_2: D2.2 Q2.3
NetD3_1: D3.1 R10.2
NetD3_2: D3.2 U3.23
NetD4_1: D4.1 R11.2
NetD4_2: D4.2 U3.22
NetD7_1: D7.1 R21.1
NetD7_2: D7.2 Q4.3
NetD11_1: D11.1 R40.2 | length 6.7
  Bottom Layer w0.2: R40.2 71.755,42.496 73.331,40.919 D11.1
NetD12_1: D12.1 S4.2
NetD13_2: D13.2 L2.1 U10.2
NetD15_1: D15.1 R42.1
NetFB3_2: FB3.2 USB1.1
NetFB6_2: FB6.2 R40.1 | length 2.2
  Bottom Layer w0.2: R40.1 FB6.2
NetJ1_1: J1.1 U4.32
NetP1_2: P1.2 R5.1
NetP4_1: P4.1 R34.1 R35.2 U7.7
NetP4_2: P4.2 R35.1 R37.2 U7.6
NetP6_2: P6.2 S4.1 | length 8.2
  Bottom Layer w0.7: P6.2 14.656,9.988 14.656,7.493 15.646,6.502 16.688,6.502 16.713,6.477 S4.1
NetQ1_1: Q1.1 R8.1 R12.2
NetQ1_3: Q1.3 R6.1 U2.5
NetQ2_1: Q2.1 R13.2 R15.1
NetQ3_1: Q3.1 R14.2 R16.1
NetQ4_1: Q4.1 R27.2 R28.1
NetR2_2: R2.2 U1.17
NetR4_2: R4.2 U1.3
NetR5_2: R5.2 U1.18
NetR7_2: R7.2 U1.16
NetR17_1: R17.1 U4.1
NetR18_1: R18.1 R19.2 U4.2
NetR22_2: R22.2 U5.28
NetR31_1: R31.1 SIM1.3 TVS1.4
NetR32_2: R32.2 SIM1.6 TVS1.1
NetR33_1: R33.1 SIM1.2 TVS1.5
NetU3_15: U3.15 USB1.3
NetU3_16: U3.16 USB1.2
NRST: C38.2 P3.2 R41.1 S3.2 U5.7
NSS1: R23.2 SD1.2 U5.61
OSC32_IN: C34.1 U5.3 Y2.2
OSC32_OUT: C41.1 U5.4 Y2.1
OSC_IN: C32.1 U5.5 Y1.2
OSC_OUT: C40.1 U5.6 Y1.1
PWM: U5.41 U6.6 U6.11
PWRKEY: Q3.3 U4.39
SCK1: R25.2 SD1.5 U5.55
SCL: R38.1 U5.58 U9.6 | length 29.7
  Top Layer w0.2: U5.58@59.004,33.718 64.046,33.718 v3(64.16,33.604)
  Bottom Layer w0.2: v3(64.16,33.604) 74.295,23.47 78.843,23.47 79.986,22.327 R38.1
  Bottom Layer w0.5: R38.1 80.186,22.327 81.05,23.19 U9.6
SDA: R39.1 U5.59 U9.5 | length 7.2
  Bottom Layer w0.5: R39.1 77.672,22.327 79.246,20.752 81.051,20.752 82.22,21.92 U9.5
SIM_CLK: R31.2 U4.16
SIM_DATA: C21.2 R32.1 U4.15
SIM_EN: R14.1 U5.27
SIM_P_SW: R8.2 U5.26
SIM_RI: R20.2 U4.7 U5.15
SIM_RST: R33.2 U4.17
SIM_VDD: C22.1 SIM1.1 TVS1.6 U4.18
SR: R36.2 U5.50 U7.2 U7.3
STATUS: R27.1 U4.42
SWCLK: P3.4 R29.1 U5.49
SWDIO: P3.3 R30.1 U5.46
VBAT: BT1.1 C36.1 D11.2 U5.1 | length 8.5
  Bottom Layer w0.5: C36.1 77.768,51.782 78.989,50.561 78.989,48.593 BT1.1 78.793,47.832 78.793,46.554 77.749,45.51 D11.2
VCC_IN: C37.1 D12.2 FB2.2 FB4.2 U10.1
VCCIO: C15.2 R10.1 R11.1 U3.4 U3.17
pads on no net: SD1.1 SD1.8 SD1.9 SIM1.5 TVS1.3 U1.2 U1.4 U1.5 U1.6 U1.7 U1.9 U1.10 U1.11 U1.12 U1.13 U1.14 U1.19 U1.20 U3.2 U3.3 U3.6 U3.8 U3.9 U3.10 U3.11 U3.12 U3.13 U3.14 U3.19 U3.24 U3.27 U3.28 U4.3 U4.4 U4.5 U4.6 U4.9 U4.10 U4.11 U4.12 U4.14 U4.20 U4.22 U4.23 U4.24 U4.25 U4.26 U4.28 U4.29 U4.38 U4.40 USB1.4 USB1.6 USB1.7 USB1.8 USB1.9 USB1.MH1 USB1.MH2
copper on no net:
  other v1: 4.405,1.511 1.48,1.674 97.877,2.222 94.952,2.385 0.993,2.953 5.095,3.075 94.465,3.664 98.567,3.786 1.297,4.314 4.547,4.395 94.769,5.025 3.003,5.106 98.019,5.106 96.475,5.817 97.039,93.637 94.114,93.8 93.627,95.079 97.729,95.201 93.931,96.44 97.181,96.521 95.637,97.232
  other v2: 96.348,25.338 96.348,33.339

## Polygon pours and split planes (outlines as drawn)
5V0 on Bottom Layer "5V0_L02_P002" (solid, remove dead copper, pour order 2): 139.725,120.117

## Keep-outs
Keep-Out Layer:
  lines w0.2: 97.536,0.051 100.076,0.051 100.076,100.051 0.051,100.051 0.051,0 0.076,0.025 100.076,0.025

## Other copper
Top Layer:
  rectangle net GND: 50.14,30.023 55.88,35.357
  region net GND: 48.946,86.589 48.895,86.639 47.828,86.639 47.828,84.988 47.803,84.963 47.854,84.912 48.92,84.912 48.92,86.512 48.87,86.563
  region: 57.226,45.009 57.226,45.085 57.506,45.364
  region: 57.912,44.475
Bottom Layer:
  rectangle net SR: 91.592,53.848 93.015,55.143
  rectangle net GND: 90.297,21.92 92.253,25.756
  rectangle net GND: 50.165,32.537 53.238,35.255
  region net 3V3: 57.683,37.605 48.158,37.605 48.158,28.169 57.683,28.169 57.683,35.522 56.515,35.522 56.515,29.794 49.428,29.794 49.428,36.652 57.683,36.652
  region: 56.693,37.389

## Silkscreen, mask and mechanical layers (free items; w line width, h text height)
Top Overlay:
  text "MHACO" at 47.65,21.311 h5
  text "1401-06-04" at 49.911,19.727 h1.5

## Text inside footprints (layer, text, board x,y; h text height)
BT1: Top Overlay "-" at 94.638,47.295 h7; Top Overlay "+" at 81.176,47.295 h7
C22: Bottom Overlay "+" at 67.361,76.784 h0.6
U1: Mechanical 13 "CUTOUT POLYGON" at 23.978,94.386 h0.25; Mechanical 13 "ANTENNA AREA" at 61.595,90.348 h0.25
USB1: Mechanical 1 "PCB Edge" at 99.687,9.837 h0.25 r90